# Altium PCB SoM BaseBoard Limbotics Prototype V0PcbDoc.PcbDoc (part 2 of 2)
Units mil, origin at the board's own origin, x right, y up, seen from the top; angles counter-clockwise.
Board outline 5680 x 2228.35 mil, 4 copper layers (Top Layer, GND, PWR, Bottom Layer), stack 61.811 mil thick; 127 components, 192 nets, 673 pads, 249 vias.
Unrouted connection lines stored in the file: 126.
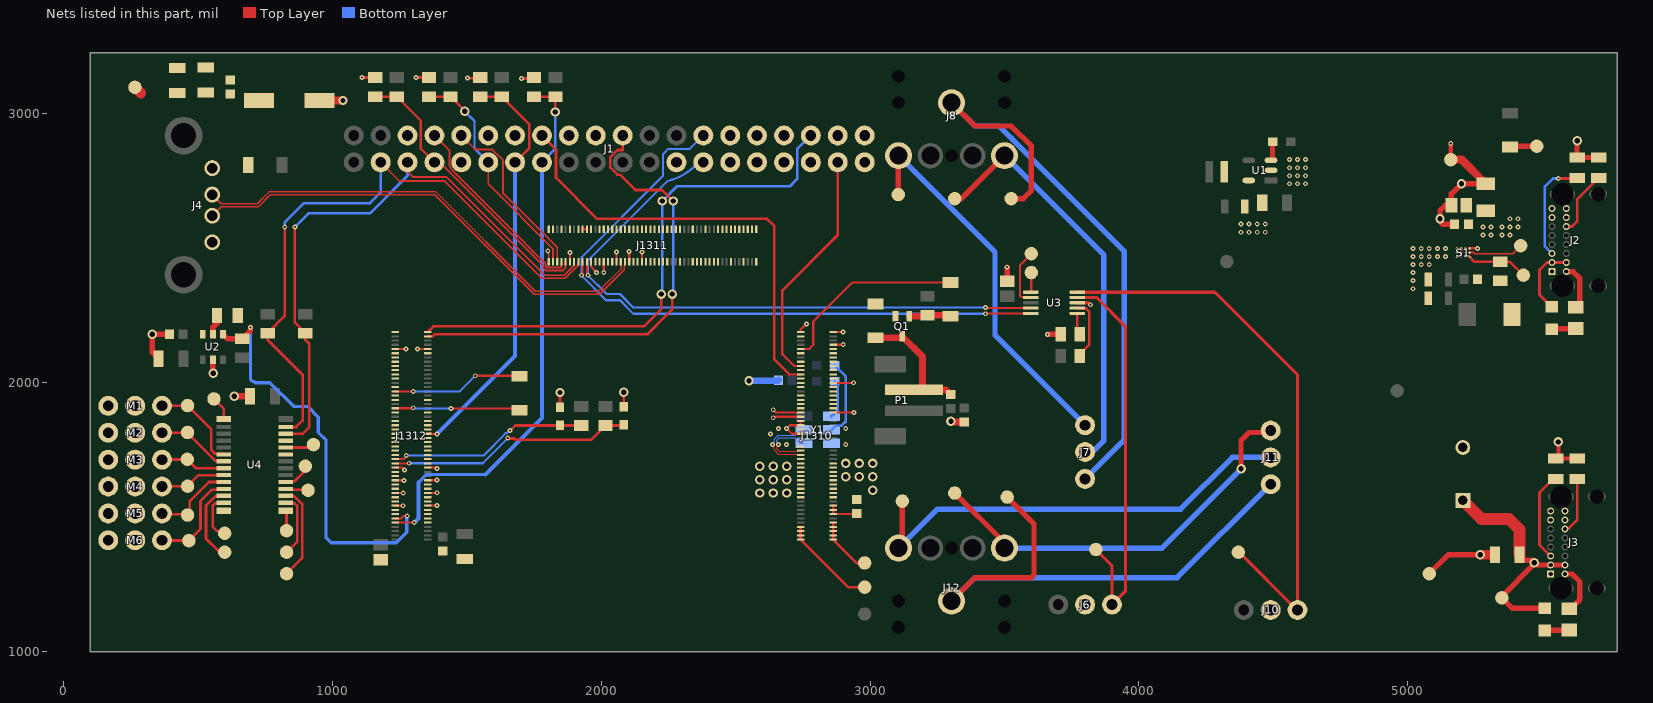
[diagram p4: the nets of this part, all layers, seen from the top]

## Via types
v1: diameter 18, hole 8, Top Layer to Bottom Layer, 168 vias
v2: diameter 35, hole 20, Top Layer to Bottom Layer, 81 vias

## Nets (pads, with @x,y where several pads share a name; then routed paths per layer and width w, separated by ;. In a path a pad name is that pad's centre, name@x,y a point inside that pad or via, vN(x,y) a via of type N, cw(c..) or ccw(c..) an arc to the next point about the centre after c; other vN are vias at no path point) (continued)
ECSPI2_MISO: J1.22 J1312.3 | length 1789.7
  Top Layer w10: J1312.3@1355.12,2172.83 1373.9,2172.83 1381.02,2179.96 2171.39,2179.96 2245.64,2254.21 2264,2272.57 v2(2264,2330) ; J1.22@2080,2920 2080,2866 2060.95,2866 2034,2839.05 2034,2800.95 2060.95,2774 2070,2774 2127,2717 2226.61,2717 v2(2267.61,2676)
  Bottom Layer w10: v2(2264,2330) 2267.61,2333.61 v2(2267.61,2676)
ECSPI2_SCLK: J1.18 J1312.2
ECSPI2_SS0: J1.36 J1312.1 | length 2025.7
  Top Layer w10: J1312.1@1355.12,2188.58 1376.5,2209.96 2158.96,2209.96 2224,2275 v2(2224,2330)
  Bottom Layer w10: v2(2224,2330) 2224,2332.43 2227.61,2336.03 v2(2227.61,2676) 2282.61,2731 2702,2731 2729,2758 2729,2869 J1.36@2780,2920
GND: C1.2 C2.2 C3.2 C4.1 C5.2 C6.2 C7.2 C8.2 C9.1 C10.1 C11.2 C12.1 C13.2 C14.1 C15.1 C16.1 C17.2 C18.2 C19.1 C21.2 C22.1 C23.1 C24.1 C25.1 D1.2 J1.6 J1.9 J1.14 J1.20 J1.25 J1.30 J1.34 J1.39 J2.A1 J2.A12 J2.B1 J2.B12 J3.A1 J3.A12 J3.B1 J3.B12 J4.4 J6.2 J10.2 J1310.1 J1310.2 J1310.7 J1310.25 J1310.39 J1310.40 J1310.42 J1310.44 J1310.46 J1310.50 J1310.56 J1310.62 J1310.63 J1310.64 J1310.65 J1310.66 J1310.67 J1310.68 J1310.69 J1310.70 J1310.71 J1310.72 J1310.73 J1310.74 J1310.75 J1310.76 J1310.77 J1310.78 J1310.80 J1311.1 J1311.2 J1311.7 J1311.8 J1311.13 J1311.14 J1311.19 J1311.20 J1311.25 J1311.26 J1311.31 J1311.32 J1311.37 J1311.38 J1311.43 J1311.44 J1311.49 J1311.50 J1311.55 J1311.56 J1311.61 J1311.62 J1311.67 J1311.68 J1311.73 J1311.74 J1311.79 J1311.80 J1311.86 J1311.89 J1311.90 J1311.94 J1311.99 J1311.100 J1312.9 J1312.10 J1312.65 J1312.66 J1312.71 J1312.72 J1312.77 J1312.78 J1312.83 J1312.84 M1.3 M2.3 M3.3 M4.3 M5.3 M6.3 Q1.2 R1.2 R2.1 R3.1 R4.1 R6.1 R7.1 R8.1 R10.1 R15.1 R18.1 R23.2 R24.2 R33.2 R34.2 R37.2 R38.2 S1.A4 S1.B4 S1.C1 S1.C4 TP9.1 TP11.1 U1.2 U2.2 U3.3 U4.14 U4.23 U4.25 Y1.3 | length 3725.7
  Top Layer w7: v1(1801.5,2490) 1801.5,2487.02 1805.12,2483.41 J1311.99@1805.12,2450
  Top Layer w8: J1312.84@1233.86,1542.91 1262.69,1542.91 v1(1262.85,1542.75) ; J1312.78@1233.86,1590.16 1263.84,1590.16 v1(1264,1590) ; J1312.72@1233.86,1637.4 1266.6,1637.4 v1(1267,1637) ; J1312.66@1233.86,1684.65 1259.64,1684.65 1268.28,1676 v1(1269,1676) ; J1312.10@1233.86,2125.59 v1(1273.59,2125.59) ; v1(1316.41,2125.59) J1312.9@1355.12,2125.59 ; J1312.83@1355.12,1542.91 1355.18,1542.98 1367.33,1542.98 v1(1389,1543) ; J1312.77@1355.12,1590.16 1388.16,1590.16 v1(1389,1591) ; J1312.71@1355.12,1637.4 1388.4,1637.4 v1(1389,1638) ; J1312.65@1355.12,1684.65 1383.65,1684.65 1387.29,1681 v1(1390,1681) ; J1311.89@1883.86,2450 v1(1883.86,2484.14) ; J1311.79@1962.6,2450 1962.6,2430.4 v1(1983,2410) ; v1(2009.84,2410.16) J1311.73@2009.84,2450 ; J1311.67@2057.09,2450 v1(2057.09,2486.91) ; v1(2104,2488) 2104.33,2487.67 J1311.61@2104.33,2450 ; J1311.55@2151.57,2450 v1(2151.57,2486.65) ; v1(2640,1870) 2642.71,1870 2646.33,1873.62 J1310.42@2741.73,1873.62 ; v1(2640,1900) 2650.63,1889.37 J1310.40@2741.73,1889.37 ; J1310.50@2741.73,1810.63 2709.37,1810.63 v1(2690,1830) 2702.13,1842.13 J1310.46@2741.73,1842.13 2741.8,1842.19 2741.8,1857.81 J1310.44@2741.73,1857.87 ; J1310.2@2741.73,2188.58 2741.73,2196.73 v1(2764,2219) ; J1310.39@2862.99,1889.37 2940.63,1889.37 v1(2941,1889) ; J1310.25@2862.99,1999.61 2937.61,1999.61 v1(2938,2000) ; J1310.7@2862.99,2141.34 2899.83,2141.34 v1(2900.57,2142.08) ; J1310.1@2862.99,2188.58 2899.58,2188.58 v1(2900,2189) ; R6.1@5550,1718.39 R6.1@5560,1728.39
  Top Layer w9: S1.C1@5230,2500 v1(5260,2500)
  Top Layer w10: v1(1111,3136) 1111.57,3135.43 R33.2@1160,3135.43 ; v1(1312,3136) 1312.57,3135.43 R34.2@1360,3135.43 ; v1(1503,3133) 1547.57,3133 R37.2@1550,3135.43 ; v1(1704,3132) 1746.57,3132 R38.2@1750,3135.43 ; R23.2@1847,1908.46 v2(1847,1964) ; R24.2@2084,1911.46 v2(2084,1965)
  Top Layer w12: U3.3@3771.3,2297.6 3771.39,2297.5 3810.87,2297.5 3818.38,2290 v1(3820,2290)
  Top Layer w15: R6.1@5550,1718.39 R7.1@5630,1718.39 ; R6.1@5560,1728.39 v2(5560,1780)
  Top Layer w18: TP9.1@5160,2830 v1(5160,2890) ; v2(5630,2900) R2.1@5630,2838.39 R4.1@5710,2838.39
  Top Layer w20: C14.1@353.74,2090 330,2113.74 v2(330,2180) C17.2@394.41,2180 ; U2.2@555.91,2086.16 555.91,2037.09 v2(557,2036) ; C19.1@3510,2377.56 v1(3510,2430) ; v1(3660,2180) R15.1@3709.57,2180 ; TP11.1@5080,1290 5150,1360 v2(5270,1360) ; C3.2@5174.41,2590 5130,2590 5120,2600 5120,2640 5140,2660 C4.1@5162.44,2660 5162.44,2702.44 v2(5200,2740) 5200.23,2740.23 C5.2@5290,2740.23 ; J3.B12@5584.69,1288.94 5611.06,1288.94 5640,1260 5640,1194.45 5604.92,1159.37 R8.1@5600,1159.37 ; J2.B12@5589.69,2413.94 5590.75,2412.87 5615.42,2412.87 5640,2388.28 5640,2294.06 5626.38,2280.43 R3.1@5625,2280.43
  Top Layer w25: v2(636,1950) C10.1@693.74,1950 ; v2(3301,1857) 3303.59,1854.41 C21.2@3350,1854.41
  Top Layer w30: C13.2@952.2,3050 v2(1040,3050) ; TP9.1@5160,2830 5200.23,2830 C5.2@5290,2740.23
  Top Layer w35: v2(5270,1360) C12.1@5323.74,1360
  Bottom Layer w25: v2(2550,2008) 2657.41,2008 C22.1@2659.41,2010
  other v1: 2690,1770 2910,1770 2630,1810 2660,1830 2910,1830 5020,2350 5020,2380 5020,2410 5020,2440 5050,2440 5080,2440 5020,2470 5050,2470 5080,2470 5110,2470 5140,2470 5020,2500 5050,2500 5080,2500 5110,2500 5140,2500 4380,2560 4410,2560 4440,2560 4470,2560 4380,2590 4410,2590 4440,2590 4470,2590 4560,2740 4590,2740 4620,2740 4560,2770 4590,2770 4620,2770 4560,2800 4590,2800 4620,2800 4560,2830 4590,2830 4620,2830
  other v2: 2590,1590 2640,1590 2690,1590 3010,1600 2590,1640 2640,1640 2690,1640 2910,1650 2960,1650 3010,1650 2590,1690 2640,1690 2690,1690 2910,1700 2960,1700 3010,1700 5120,2610
GPIO6: J1.13 J1312.49 R35.2 R37.1 | length 1553.6
  Top Layer w8: J1312.49@1355.12,1810.63 1355.18,1810.57 1368.43,1810.57 1369,1810 v1(1390,1810)
  Top Layer w9: R37.1@1550,3064.57 R35.2@1630,3064.57 1732,2962.57 1732,2872 J1.13@1680,2820
  Bottom Layer w15: v1(1390,1810) 1680,2100 J1.13@1680,2820
GPIO7: J1.29 J1312.45
GPIO8: J1.31 J1312.47
HDMI_REFCLK_N: J1310.60 Y1.5 | length 276.4
  Top Layer w4.51: v1(2637,1770) 2637,1767.36 2643.75,1760.61 2643.75,1750.52 2659.26,1735.01 2715.62,1735.01 2728.77,1735.01 2731.89,1731.89 J1310.60@2741.73,1731.89
  Bottom Layer w4.51: v1(2637,1770) 2637,1772.64 2643.75,1779.39 2643.75,1789.48 2659.02,1804.75 2721.94,1804.75 2724.58,1807.39 2724.58,1809.73 2739.84,1825 Y1.5@2753.82,1825
HDMI_REFCLK_P: J1310.58 Y1.4 | length 244.9
  Top Layer w4.51: v1(2660,1770) 2660,1767.36 2653.25,1760.61 2653.25,1754.46 2663.19,1744.52 2711.68,1744.52 2728.77,1744.52 2731.89,1747.64 J1310.58@2741.73,1747.64
  Bottom Layer w4.51: v1(2660,1770) 2660,1772.64 2653.25,1779.39 2653.25,1785.54 2662.96,1795.25 2721.94,1795.25 2724.58,1792.61 2724.58,1790.27 2739.84,1775 Y1.4@2753.82,1775
I2C2_SCL: J1.5 J1311.87 R27.2 U4.26 | length 2254.6
  Top Layer w7: J1.5@1280,2820 1280,2785.75 1300,2765.75 1424.25,2765.75 1790,2400 1862.18,2400 1899.17,2436.99 1899.17,2449.56 J1311.87@1899.61,2450
  Top Layer w10: U4.26@826.98,1810.16 889.66,1810.16 914.75,1835.25 914.75,2145.13 900,2159.88 R27.2@900,2184.57 861,2223.57 v1(861,2580)
  Bottom Layer w10: v1(861,2580) 911,2630 1140,2630 1280,2770 J1.5@1280,2820
I2C2_SDA: J1.3 J1311.85 R28.2 U4.27 | length 2350.8
  Top Layer w7: J1.3@1180,2820 1250,2750 1417.73,2750 1778.73,2389 1866.93,2389 1914.92,2436.99 1914.92,2449.56 J1311.85@1915.35,2450
  Top Layer w10: v1(823,2580) 823,2247.57 R28.2@760,2184.57 760,2159.88 890,2029.88 890,1860 865.75,1835.75 U4.27@826.98,1835.75
  Bottom Layer w10: v1(823,2580) 823,2595.74 895.26,2668 1140,2668 1180,2708 J1.3@1180,2820
I2C3_SCL: J1.28 J1311.83 U3.10 | length 2537.6
  Top Layer w8: v1(1927.48,2400) 1931.1,2403.63 J1311.83@1931.1,2450 ; v1(3430,2257) 3430.61,2257.61 3597.46,2257.61 U3.10@3598.07,2258.23
  Bottom Layer w8: J1.28@2380,2920 2330,2870 2250,2870 2230,2850 2230,2770 1927.48,2467.48 v1(1927.48,2400) 1927.48,2397.54 2018.02,2307 2070,2307 2120,2257 v1(3430,2257)
I2C3_SDA: J1.27 J1311.81 U3.9 | length 2377.1
  Top Layer w8: J1311.81@1946.85,2450 1946.85,2403.63 v1(1950.48,2400) ; v1(3430,2280) 3431.91,2278.09 3438.98,2278.09 3439.16,2277.91 U3.9@3598.07,2277.91
  Bottom Layer w8: J1.27@2380,2820 2363,2820 2352.05,2809.05 cw(c2198.13,2962.96) 2248.11,2751.11 1950.48,2453.48 v1(1950.48,2400) 2020.48,2330 2070,2330 2120,2280 v1(3430,2280)
MYO_END_1: J7.2 J8.3 TP14.1 | length 1551.7
  Top Layer w20: TP14.1@3315,2685 3340.28,2685 J8.3@3500,2844.72
  Bottom Layer w20: J8.3@3500,2844.72 3870,2474.72 3870,1785 3827.5,1742.5 J7.2@3800,1742.5
MYO_END_2: J11.2 J12.3 TP17.1 | length 1703.8
  Top Layer w20: J12.3@3106.3,1385.28 3120,1398.98 TP17.1@3120,1560
  Bottom Layer w20: J12.3@3106.3,1385.28 3251.02,1530 4155,1530 4347.5,1722.5 J11.2@4490,1722.5
MYO_MID_1: J7.3 J8.1 TP13.1 | length 2394.4
  Top Layer w20: J8.1@3303.15,3041.57 3389.72,2955 3525,2955 3600,2880 3600,2715 3570,2685 TP13.1@3525,2685
  Bottom Layer w20: J8.1@3303.15,3041.57 3389.72,2955 3480,2955 3526.08,2908.92 3526.59,2908.92 3564.2,2871.32 3564.2,2870.8 3945,2490 3945,1787.5 J7.3@3800,1642.5
MYO_MID_2: J11.3 J12.1 TP16.1 | length 2044.9
  Top Layer w20: J12.1@3303.15,1188.43 3303.43,1188.43 3390,1275 3600,1275 3610,1285 3610,1475 TP16.1@3510,1575
  Bottom Layer w20: J12.1@3303.15,1188.43 3389.72,1275 4142.5,1275 J11.3@4490,1622.5
MYO_REF_1: J7.1 J8.2 TP15.1 | length 1434.8
  Top Layer w20: TP15.1@3105,2700 3105,2843.43 J8.2@3106.3,2844.72
  Bottom Layer w20: J8.2@3106.3,2844.72 3465,2486.02 3465,2177.5 J7.1@3800,1842.5
MYO_REF_2: J11.1 J12.2 TP18.1 | length 1514
  Top Layer w20: TP18.1@3315,1590 3500,1405 J12.2@3500,1385.28 ; v2(4380,1680) 4380,1785 4410,1815 4482.5,1815 J11.1@4490,1822.5
  Bottom Layer w20: J12.2@3500,1385.28 4085.28,1385.28 v2(4380,1680)
NAND_DATA03: J1.16 J1310.22 | length 1682
  Top Layer w8: 2699.9,2031.1 J1310.22@2741.73,2031.1
  Top Layer w10: J1.16@1780,2920 1832,2868 1832,2763 1985,2610 2617,2610 2644,2583 2644,2087 2699.9,2031.1
NAND_DATA07: J1.37 J1310.18 | length 884.5
  Top Layer w8: 2674,2107 2718.4,2062.6 J1310.18@2741.73,2062.6
  Top Layer w10: 2674,2107 2674,2344 2880,2550 J1.37@2880,2820
NetC20_1: C20.1 P1.2 Q1.3 R18.2 | length 480.2
  Top Layer w25: R18.2@3020,2167.01 3114.41,2167.01 Q1.3@3120,2172.6 3195,2097.6 3195,1985 P1.2@3184.37,1974.37 ; P1.2@3163.58,1974.37 P1.2@3184.37,1974.37 ; C20.1@3300,1955.59 3281.22,1974.37 P1.2@3184.37,1974.37
NetJ2_A5: J2.A5 R2.2 | length 393.2
  Top Layer w10: v1(5560,2760) 5628.39,2760 R2.2@5630,2761.61
  Bottom Layer w10: J2.A5@5536.54,2480.87 5510,2507.4 5510,2730 5540,2760 v1(5560,2760)
NetJ2_B5: J2.B5 R4.2 | length 242.8
  Top Layer w10: J2.B5@5589.69,2581.26 5611.26,2581.26 5630,2600 5630,2681.61 R4.2@5710,2761.61
NetJ3_A5: J3.A5 R6.2 | length 333.6
  Top Layer w10: J3.A5@5531.54,1355.87 5490,1397.4 5490,1591.46 5540.16,1641.61 R6.2@5550,1641.61
NetJ3_B5: J3.B5 R7.2 | length 210.9
  Top Layer w10: J3.B5@5584.69,1456.26 5587.67,1459.24 5599.24,1459.24 5630,1490 R7.2@5630,1641.61
NetJ6_1: J6.1 TP34.1 U3.4 | length 1508.7
  Top Layer w12: U3.4@3771.3,2317.28 3842.72,2317.28 3950,2210 3950,1225 J6.1@3900,1175 3900,1320 TP34.1@3840,1380
NetJ10_1: J10.1 TP35.1 U3.5 | length 2129.9
  Top Layer w12: U3.5@3771.3,2336.97 4283.03,2336.97 4590,2030 J10.1@4590,1155 4587.5,1155 4372.5,1370 TP35.1@4370,1370
NetJ1310_4: J1310.4
NetJ1310_9: J1310.9
NetJ1310_10: J1310.10 R17.1 | length 711.7
  Top Layer w8: J1310.10@2741.73,2125.59 2773.59,2125.59 2789,2141 2789,2228 2933.99,2372.99 R17.1@3300,2372.99
NetJ1310_11: J1310.11
NetJ1310_12: J1310.12
NetJ1310_13: J1310.13
NetJ1310_15: J1310.15
NetJ1310_16: J1310.16
NetJ1310_17: J1310.17
NetJ1310_19: J1310.19
NetJ1310_20: J1310.20
NetJ1310_21: J1310.21
NetJ1310_23: J1310.23
NetJ1310_24: J1310.24
NetJ1310_26: J1310.26
NetJ1310_27: J1310.27
NetJ1310_28: J1310.28
NetJ1310_29: J1310.29
NetJ1310_31: J1310.31
NetJ1310_32: J1310.32
NetJ1310_33: J1310.33
NetJ1310_34: J1310.34
NetJ1310_35: J1310.35
NetJ1310_36: J1310.36
NetJ1310_37: J1310.37
NetJ1310_38: J1310.38
NetJ1310_48: J1310.48
NetJ1310_79: J1310.79
NetJ1311_4: J1311.4
NetJ1311_6: J1311.6
NetJ1311_10: J1311.10
NetJ1311_12: J1311.12
NetJ1311_16: J1311.16
NetJ1311_18: J1311.18
NetJ1311_21: J1311.21
NetJ1311_23: J1311.23
NetJ1311_27: J1311.27
NetJ1311_29: J1311.29
NetJ1311_40: J1311.40
NetJ1311_42: J1311.42
NetJ1311_45: J1311.45
NetJ1311_46: J1311.46
NetJ1311_47: J1311.47
NetJ1311_48: J1311.48
NetJ1311_51: J1311.51
NetJ1311_52: J1311.52
NetJ1311_53: J1311.53
NetJ1311_54: J1311.54
NetJ1311_57: J1311.57
NetJ1311_58: J1311.58
NetJ1311_59: J1311.59
NetJ1311_60: J1311.60
NetJ1311_64: J1311.64
NetJ1311_66: J1311.66
NetJ1311_69: J1311.69
NetJ1311_70: J1311.70
NetJ1311_71: J1311.71
NetJ1311_72: J1311.72
NetJ1311_75: J1311.75 J1311.77
NetJ1311_76: J1311.76
NetJ1311_82: J1311.82 J1311.84 | length 15.7
  Top Layer w8: J1311.84@1931.1,2571.26 J1311.82@1946.85,2571.26
NetJ1311_98: J1311.98
NetJ1312_11: J1312.11
NetJ1312_12: J1312.12
NetJ1312_14: J1312.14
NetJ1312_16: J1312.16
NetJ1312_18: J1312.18
NetJ1312_20: J1312.20
NetJ1312_22: J1312.22
NetJ1312_24: J1312.24
NetJ1312_28: J1312.28
NetJ1312_30: J1312.30 R25.1 | length 487
  Top Layer w8: J1312.30@1233.86,1968.11 1300.89,1968.11 v1(1301,1968) ; v1(1532,2026) 1693.99,2026 R25.1@1696,2023.99
  Bottom Layer w8: v1(1301,1968) 1474,1968 v1(1532,2026)
NetJ1312_32: J1312.32
NetJ1312_34: J1312.34
NetJ1312_38: J1312.38 R25.2 | length 466.6
  Top Layer w8: J1312.38@1233.86,1905.12 1299.12,1905.12 v1(1301,1907) ; v1(1441,1905) 1689.01,1905 R25.2@1696,1898.01
  Bottom Layer w8: v1(1301,1907) 1303,1905 v1(1441,1905)
NetJ1312_39: J1312.39
NetJ1312_43: J1312.43
NetJ1312_48: J1312.48
NetJ1312_50: J1312.50
NetJ1312_51: J1312.51
NetJ1312_52: J1312.52
NetJ1312_53: J1312.53
NetJ1312_54: J1312.54
NetJ1312_55: J1312.55
NetJ1312_56: J1312.56
NetJ1312_57: J1312.57
NetJ1312_58: J1312.58
NetJ1312_59: J1312.59
NetJ1312_60: J1312.60
NetJ1312_61: J1312.61
NetJ1312_62: J1312.62 R22.2 R23.1 | length 746.1
  Top Layer w8: J1312.62@1233.86,1716.14 1266.04,1716.14 1275,1725.1 v1(1275,1729) ; v1(1661,1822) 1680,1841
  Top Layer w10: 1680,1841 1847.54,1841 R22.2@1926,1841
  Bottom Layer w8: v1(1275,1729) 1562.14,1729 1645.34,1812.2 1648.5,1812.2 1658.29,1822 v1(1661,1822)
NetJ1312_63: J1312.63
NetJ1312_64: J1312.64 R21.2 R24.1 | length 915
  Top Layer w8: J1312.64@1233.86,1700.39 1285.39,1700.39 v1(1286,1701)
  Top Layer w10: v1(1652.8,1794.2) 1654,1793 1676.8,1793 1681.8,1788 1963,1788 R21.2@2016,1841 2080.46,1841 R24.1@2084,1844.54
  Bottom Layer w8: v1(1286,1701) 1559.59,1701 v1(1652.8,1794.2)
NetJ1312_68: J1312.68
NetJ1312_70: J1312.70
NetJ1312_73: J1312.73
NetJ1312_74: J1312.74
NetJ1312_75: J1312.75
NetJ1312_76: J1312.76
NetJ1312_79: J1312.79
NetJ1312_80: J1312.80
NetJ1312_81: J1312.81
NetJ1312_82: J1312.82
NetJ1312_85: J1312.85
NetJ1312_86: J1312.86
NetJ1312_87: J1312.87
NetJ1312_89: J1312.89
NetJ1312_91: J1312.91
NetLED1_1: LED1.1 R3.2 | length 90.8
  Top Layer w20: LED1.1@5535,2199.72 5535.98,2200.71 5624.02,2200.71 R3.2@5625,2201.69
NetLED2_1: LED2.1 R8.2 | length 90.8
  Top Layer w20: LED2.1@5510,1078.66 5510.98,1079.65 5599.02,1079.65 R8.2@5600,1080.63
NetQ1_1: Q1.1 R16.2 R17.2 | length 158
  Top Layer w25: Q1.1@3145.59,2247.4 3209.81,2247.4 R16.2@3214.01,2251.6 3295.41,2251.6 R17.2@3300,2247.01
NetR1_1: R1.1 S1.A1 TP4.1 | length 228.4
  Top Layer w9: S1.A1@5230,2468.5 5248.82,2449.68 R1.1@5344.25,2449.68 5380.31,2449.68 TP4.1@5430,2400
NetR10_2: R10.2 U2.5 | length 75.9
  Top Layer w20: U2.5@555.91,2180.65 555.91,2205.91 571.61,2221.61 R10.2@571.61,2250
NetR12_1: R12.1 U3.2 | length 228.2
  Top Layer w10: U3.2@3771.3,2277.91 3772.2,2277.01 3802.99,2277.01 3814.81,2265.19 3814.81,2141.27 3780.43,2106.89 R12.1@3780.43,2100
NetR15_2: R15.2 U3.1 | length 82
  Top Layer w8: R15.2@3771.3,2189.13 R15.2@3780.43,2180
  Top Layer w10: R15.2@3771.3,2189.13 U3.1@3771.3,2258.23
NetR19_1: R19.1 Y1.2 | length 292.4
  Bottom Layer w10: Y1.2@2856.18,1825 2871.18,1840 2893.13,1840 2896.57,1843.43 2910,1856.87 2910,2023.46 R19.1@2868.46,2065
NetR20_1: R20.1 Y1.1 | length 162
  Bottom Layer w10: Y1.1@2856.18,1875 2880,1898.82 2880,1993.46 R20.1@2868.46,2005
  Bottom Layer w12: Y1.1@2856.18,1875 Y1.1@2868.46,1887.28
NetR26_1: R26.1 U1.3 | length 57.2
  Top Layer w18: U1.3@4491.36,2827.4 4497.54,2833.58 R26.1@4497.54,2882
NetS1_B1: S1.B1 TP8.1 | length 204.2
  Top Layer w7: S1.B1@5230,2484.25 5245.75,2484.25 5250,2480 5390,2480 TP8.1@5420,2510
NetTP23_1: TP23.1 U3.6 | length 74.4
  Top Layer w10: U3.6@3598.07,2336.97 3599.09,2336.97 3600,2337.87 TP23.1@3600,2410
NetTP24_1: TP24.1 U3.7 | length 216.8
  Top Layer w8: U3.7@3598.07,2317.28 3596.17,2319.19 3562.34,2319.19 3557.66,2323.88 3557.66,2437.66 TP24.1@3600,2480
NetTP27_1: TP27.1 U4.1 | length 89.9
  Top Layer w10: TP27.1@560,1940 596.66,1903.34 U4.1@596.66,1865.28
NetTP28_1: TP28.1 U4.12 | length 295.8
  Top Layer w10: U4.12@596.66,1579.84 593.94,1577.13 563.87,1577.13 530,1543.25 530,1420 572.35,1377.65 592.35,1377.65 TP28.1@600,1370
NetTP29_1: TP29.1 U4.13 | length 178.9
  Top Layer w10: U4.13@596.66,1554.25 593.94,1551.54 563.87,1551.54 555.09,1542.75 555.09,1465.86 573.29,1447.65 592.35,1447.65 TP29.1@600,1440
NetTP30_1: TP30.1 U4.24 | length 107.6
  Top Layer w10: U4.24@826.98,1758.98 908.15,1758.98 919.18,1770 TP30.1@930,1770
NetTP31_1: TP31.1 U4.15 | length 76
  Top Layer w10: U4.15@826.98,1524.72 830,1521.7 TP31.1@830,1450
NetTP32_1: TP32.1 U4.16 | length 236.3
  Top Layer w10: U4.16@826.98,1554.25 829.69,1551.54 859.76,1551.54 870,1541.3 870,1410 TP32.1@830,1370
NetTP33_1: TP33.1 U4.17 | length 356.7
  Top Layer w10: U4.17@826.98,1579.84 829.69,1577.13 859.76,1577.13 887.87,1549.02 887.87,1347.87 TP33.1@830,1290
NetTP36_1: TP36.1 U4.18 | length 85.3
  Top Layer w10: U4.18@826.98,1605.43 829.69,1602.72 907.28,1602.72 TP36.1@910,1600
NetTP37_1: TP37.1 U4.19 | length 106.8
  Top Layer w10: U4.19@826.98,1631.02 829.69,1633.74 859.76,1633.74 892.35,1666.32 892.35,1682.35 TP37.1@900,1690
nUSBFault: J1.33 J1312.90 R9.1 U2.4 | length 1531.9
  Top Layer w8: J1312.90@1233.86,1495.67 1256.67,1495.67 1265,1504 v1(1279,1504)
  Top Layer w20: U2.4@593.32,2180.65 610.69,2163.27 R9.1@665,2163.27 696,2194.27 v1(696,2206)
  Bottom Layer w12: v1(696,2206) 696,2012.03 703.03,2005 708,2005 713,2000 768,2000 856,1912 908,1912 948,1872 948,1815 977,1786 977,1424 996,1405 1238,1405 1277,1444 1277,1502 v1(1279,1504)
NVCC_ENET_2V5: C1.1 J1310.83 J1310.85 J1310.87 | length 119.7
  Top Layer w8: J1310.83@2862.99,1542.91 J1310.85@2862.99,1527.17 J1310.87@2862.99,1511.42 2947.01,1511.42 C1.1@2950,1514.41
PWM1: J1.32 J1312.88
PWM3: J1.15 J1312.92 R36.2 R38.1 | length 2082.1
  Top Layer w8: J1312.92@1233.86,1479.92 1233.92,1479.98 1248.98,1479.98 v1(1305,1480)
  Top Layer w9: R38.1@1750,3064.57 R36.2@1830,3064.57 1830,3008 v2(1829,3007)
  Bottom Layer w9: J1.15@1780,2820 1829,2869 v2(1829,3007)
  Bottom Layer w10: 1350,1659 1570,1659
  Bottom Layer w12: 1320,1629 1350,1659
  Bottom Layer w15: v1(1305,1480) 1320,1495 1320,1629 ; 1570,1659 1780,1869 J1.15@1780,2820
SAI1_RXD0: J1.38 J1312.33
SAI1_TXC: J1.12 J1312.40
SAI1_TXD0: J1.40 J1312.44
SAI1_TXFS: J1.35 J1312.46
SERVO_1: M1.1 TP19.1 U4.6 | length 350.8
  Top Layer w10: M1.1@366.83,1914.17 367.36,1914.7 461.3,1914.7 TP19.1@461.83,1915.24 550,1827.06 550,1749.98 563.87,1736.1 593.94,1736.1 U4.6@596.66,1733.39
SERVO_2: M2.1 TP20.1 U4.7 | length 276.3
  Top Layer w10: M2.1@366.83,1814.17 367.36,1814.7 461.3,1814.7 TP20.1@461.83,1815.24 461.83,1812.56 563.79,1710.59 593.87,1710.59 U4.7@596.66,1707.8
SERVO_3: M3.1 TP21.1 U4.8 | length 244
  Top Layer w10: M3.1@366.83,1714.17 367.36,1714.7 460.3,1714.7 TP21.1@460.83,1715.24 493.86,1682.2 U4.8@596.66,1682.2
SERVO_4: M4.1 TP22.1 U4.9 | length 247.4
  Top Layer w10: M4.1@366.83,1614.17 367.36,1614.7 461.3,1614.7 TP22.1@461.83,1615.24 503.2,1656.61 U4.9@596.66,1656.61
SERVO_5: M5.1 TP25.1 U4.10 | length 308.9
  Top Layer w10: M5.1@366.83,1514.17 369.86,1511.14 458.8,1511.14 TP25.1@461.83,1508.11 469.48,1515.76 469.48,1533.45 470,1533.97 470,1560 541.02,1631.02 U4.10@596.66,1631.02
SERVO_6: M6.1 TP26.1 U4.11 | length 370.7
  Top Layer w10: M6.1@366.83,1414.17 367.36,1413.64 466.3,1413.64 TP26.1@466.83,1413.11 510,1456.28 510,1560 552.72,1602.72 593.94,1602.72 U4.11@596.66,1605.43
SW: L1.1 U1.5
UART1_RXD: J1.10 J1311.95 | length 654.6
  Top Layer w7: J1.10@1480,2920 1532.69,2867.31 1595.63,2867.31 1635.5,2827.43 1635.5,2704.5 1836.61,2503.39 J1311.95@1836.61,2450
UART1_TXD: J1.8 J1311.93 | length 735.6
  Top Layer w7: J1.8@1380,2920 1435.5,2864.5 1435.5,2837.39 1435.5,2834.5 cw(c1429.62,2830.7) 1436.47,2829.26 ccw(c1480,2820) 1448.53,2788.53 1717.56,2519.51 1718.4,2517.15 1728.65,2506.9 1734.62,2501.32 1744.49,2491.46 1793.68,2441.88 1793.68,2433.11 1798.07,2428.72 1814.17,2428.72 1827.91,2428.72 1827.96,2428.77 1828.74,2428.77 1829.52,2428.77 1829.57,2428.72 1847.82,2428.72 1851.93,2432.82 1851.93,2449.56 J1311.93@1852.36,2450
UART3_RXD: J1.11 J1311.97 R32.2 R34.1 | length 852.3
  Top Layer w7: J1.11@1580,2820 1580,2740 1820.87,2499.13 J1311.97@1820.87,2450
  Top Layer w9: R34.1@1360,3064.57 R32.2@1440,3064.57 1492,3012.57 v2(1492,3010)
  Bottom Layer w9: v2(1492,3010) 1529,2973 1529,2871 J1.11@1580,2820
UART3_TXD: J1.7 J1311.91 R31.2 R33.1 | length 1068.6
  Top Layer w7: J1.7@1380,2820 1400,2820 1782.68,2437.32 1782.68,2428.56 1793.52,2417.72 1857.72,2417.72 1868.11,2428.11 J1311.91@1868.11,2450
  Top Layer w9: R33.1@1160,3064.57 R31.2@1240,3064.57 1329,2975.57 1329,2871 J1.7@1380,2820
USB2_D_N: J4.2 J1311.65 | length 1768.5
  Top Layer w5.85: J4.2@553.54,2700 587.49,2666.05 720.73,2666.05 764.68,2710 1385.34,2710 1755.34,2340 1990.34,2340 2075.28,2424.94 2075.28,2437.71 2072.83,2440.16 J1311.65@2072.83,2450
USB2_D_P: J4.3 J1311.63 | length 1786.5
  Top Layer w5.85: J4.3@553.54,2621.26 587.49,2655.21 725.22,2655.21 769.17,2699.15 1380.85,2699.15 1750.85,2329.15 1994.84,2329.15 2086.13,2420.45 2086.13,2437.71 2088.58,2440.16 J1311.63@2088.58,2450
USB_5V_Servos: C11.1 C12.2 J3.A4 J3.A9 J3.B4 J3.B9 LED2.2 M1.2 M2.2 M3.2 M4.2 M5.2 M6.2 TP10.1 | length 896.7
  Top Layer w20: C12.2@5416.26,1360 5416.26,1348.19 5424.96,1339.49 5460.51,1339.49 v2(5470,1330) ; LED2.2@5510,1161.34 5389.12,1161.34 5350.46,1200 TP10.1@5350,1200 5350,1205.94 5470,1325.94 v2(5470,1330) ; J3.B9@5584.69,1322.4 5481.66,1322.4 5474.06,1330 v2(5470,1330)
  Top Layer w45: C11.1@5205,1562.64 5273.7,1493.94 5375.96,1493.94 5416.26,1453.64 C12.2@5416.26,1360
USB_5V_SoM: C3.1 C4.2 C5.1 J2.A4 J2.A9 J2.B4 J2.B9 LED1.2 R5.1 S1.B3 S1.C2 S1.C3 TP5.1 | length 384.3
  Top Layer w9: S1.B3@5198.5,2484.25 S1.C3@5198.5,2500
  Top Layer w10: LED1.2@5535,2282.4 5490,2327.4 5490,2420 5517.4,2447.4 J2.A4@5536.54,2447.4 J2.B9@5589.69,2447.4
  Top Layer w20: R5.1@5380,2877.01 5382.99,2880 TP5.1@5480,2880
  other v1: 5280,2550 5310,2550 5350,2550 5380,2550 5280,2580 5310,2580 5350,2580 5380,2580 5410,2580 5380,2610 5410,2610
VDD_3V3: J1310.94 J1310.96 J1310.98 J1310.100 TP2.1 | length 358.8
  Top Layer w10: J1310.94@2741.73,1464.17 J1310.96@2741.73,1448.43 J1310.98@2741.73,1432.68 J1310.100@2741.73,1416.93 2918.66,1240 TP2.1@2980,1240
VDDA_1V8: J1310.91 J1310.93 J1310.95 J1310.97 J1310.99 TP3.1 | length 220
  Top Layer w10: J1310.91@2862.99,1479.92 J1310.93@2862.99,1464.17 J1310.95@2862.99,1448.43 J1310.97@2862.99,1432.68 J1310.99@2862.99,1416.93 2949.92,1330 TP3.1@2984,1330
VUSB: C13.1 C15.2 C16.2 C18.1 J4.1 R11.2 TP12.1 U2.6 | length 30.2
  Top Layer w40: TP12.1@266,3099 287.36,3077.64
pads on no net: J2.1 J2.2 J2.3 J2.4 J2.A6 J2.A7 J2.A8 J2.B6 J2.B7 J2.B8 J3.1 J3.2 J3.3 J3.4 J3.A6 J3.A7 J3.A8 J3.B6 J3.B7 J3.B8 J4.MH1 J4.MH2 J8.10 J8.11 J8.MH1 J8.MH2 J8.MH3 J8.MH4 J8.MH5 J12.10 J12.11 J12.MH1 J12.MH2 J12.MH3 J12.MH4 J12.MH5 J1310.3 J1310.5 J1310.8 J1310.14 J1310.30 J1310.41 J1310.43 J1310.45 J1310.47 J1310.49 J1310.51 J1310.52 J1310.53 J1310.54 J1310.55 J1310.57 J1310.59 J1310.61 J1310.81 J1310.82 J1310.89 J1310.92 J1311.3 J1311.5 J1311.9 J1311.11 J1311.15 J1311.17 J1311.22 J1311.24 J1311.28 J1311.30 J1311.33 J1311.34 J1311.35 J1311.36 J1311.39 J1311.41 J1311.78 J1311.88 J1311.92 J1311.96 J1312.6 J1312.13 J1312.15 J1312.17 J1312.19 J1312.21 J1312.23 J1312.25 J1312.26 J1312.27 J1312.29 J1312.31 J1312.35 J1312.36 J1312.37 J1312.41 J1312.42 J1312.67 J1312.69 P1.MP1 P1.MP2 U4.2 U4.3 U4.4 U4.5 U4.20 U4.21 U4.22

## Polygon pours and split planes (outlines as drawn)
GND on Top Layer "GND_L01_P021" (solid, pour order 21): 2755,1569.81 2755,1720 2557,1720 2550,1713 2550,1569.81
GND on Top Layer "GND_L01_P020" (solid, pour order 20): 2849,1704 2849,1586 2878,1586 2915,1549 3009,1549 3040,1580 3040,1720 3030,1730 2906.12,1730 2880.12,1704
5VSYS on Top Layer "SoM 5V" (solid, pour order 19): 1220,1468 1220,1430 1209,1419 1154,1419 1154,1376 1360,1376 1395,1411 1591,1411 1695,1515 1695,1620 1682,1633 1433,1633 1410,1610 1410,1489 1389,1468
VUSB on Top Layer "VUSB_L01_P018" (solid, pour order 18): 784,3078 672,3078 659,3091 586,3091 578,3099 266,3099 256,3089 256,2327 313,2270 419,2270 506,2183 506,2166 508,2164 529,2164 529,2281 430,2380 430,2724 460,2754 687,2754 725,2792 725,2873 726,2873 785,2932
5VSYS on Top Layer "5VSYS_L01_P016" (solid, pour order 16): 582,2102 582,2071 586,2067 694,2067 731,2030 760,2030 766,2036 766,2122 757,2131 706,2131 688,2113 636,2113 626,2103 590,2103
5VSYS on Top Layer "5VSYSFromInput" (solid, pour order 14): 5214.36,2488.48 5218.52,2484.32 5218.52,2451.09 5225.97,2443.64 5225.97,2366.98 5224.18,2365.19 5254.18,2335.18 5254.18,2175.82 5330,2100 5330,1950 5320,1940 4940,1940 4930,1950 4930,2074.62 5137.69,2282.31 5137.69,2409.84 5187.86,2453.67 5195.75,2471.18 5206.85,2477.79 5210.25,2485.68
GND on Top Layer "5VIN GND" (solid, pour order 10): 5186.98,2470.27 5186.98,2500.69 5182.7,2504.49 5160,2527.2 5017.2,2527.2 5000,2510 5000,2330 5060,2270 5090,2270 5100,2280 5100,2410 5121.17,2410
USB_5V_SoM on Top Layer "Top Layer-USB_5V_SoM" (solid, pour order 12): 5202.98,2487.88 5206.84,2493.07 5216.57,2496.16 5218.46,2498.52 5218.46,2510.13 5225.91,2517.57 5230.29,2519.36 5387.67,2519.36 5468.55,2600.24 5599.45,2600.24 5609.52,2610.31 5609.52,2626.13 5516.74,2626.13 5410,2732.87 5410,2900 5340,2900 5340,2695.91 5330.21,2686.13 5203.69,2686.13 5203.69,2551.44 5194.71,2542.46 5194.71,2497.21 5194.03,2496.54 5194.41,2496.16 5194.41,2487.88
5VSYS on Top Layer "5VIN BYPASS" (solid, pour order 13): 5120,2980 5120,3120 5160,3160 5560,3160 5620,3100 5620,3010 5590,2980
3V3 on Top Layer "3V3 Out" (solid, pour order 6): 4274.47,2824.02 4274.68,2823.81 4274.68,2734.32 4328,2681 4332,2681 4332,2628 4332,2553 4317,2538 4200,2538 4178,2560 4178,2765 4237,2824 4247,2824
GND on Top Layer "3V3 Buck Reg GND" (solid, pour order 3): 4525,2853 4526,2854 4640,2854 4640,2730 4632,2722 4545,2722 4534,2733 4534,2763 4517,2780 4470,2780 4460,2770 4460,2716 4486,2690 4486,2552 4473,2539 4373,2539 4361,2551 4361,2677 4407,2723 4428,2723 4438,2733 4438,2789 4449,2800 4509,2800 4521,2812
5VSYS on Top Layer "3V3 Buck Reg Vin-5VSYS" (solid, pour order 5): 4467.65,2762.86 4467.65,2732.35 4503,2697 4503,2557 4510,2550 4678,2550 4686,2558 4686,2682 4668,2700 4542,2700 4515,2727 4515,2763
SW on Top Layer "3V3 Switch" (solid, pour order 2): 4422.44,2742.01 4421.79,2742.66 4304.45,2742.66 4304.45,2824.35 4305.41,2825.32 4331.29,2825.32 4393.43,2763.18 4418.82,2763.18 4425,2757
GND on GND (split plane): 5759.9,1020.1 120.1,1020.1 120.1,3208.25 5759.9,3208.25
USB_5V_SoM on PWR (split plane): 5751.9,2917.89 5751.9,2289.11 5717.89,2255.1 5502.11,2255.1 5332.6,2424.6 5330.95,2425.71 5329,2426.1 5071.11,2426.1 5013.1,2484.11 5013.1,2835.89 5117.11,2939.9 5729.89,2939.9
3V3 on PWR (split plane): 4324.9,2626.89 4324.9,1983.11 4232.89,1891.1 3504.11,1891.1 3285.6,2109.6 3283.95,2110.71 3282,2111.1 2930,2111.1 2928.05,2110.71 2926.4,2109.6 2751.89,1935.1 1839.11,1935.1 1751.1,2023.11 1751.1,2277 1750.71,2278.95 1749.6,2280.6 1412.6,2617.6 1410.95,2618.71 1409,2619.1 992,2619.1 990.05,2618.71 988.4,2617.6 958.4,2587.6 957.29,2585.95 956.9,2584 956.9,2326.11 904.89,2274.1 756.11,2274.1 727.1,2303.11 727.1,2568.89 1024.11,2865.9 4085.89,2865.9
GND on PWR (split plane): 2934.9,1755.1 2615.1,1755.1 2615.1,1810 2615.1,1844.9 2934.9,1844.9
5VSYS on PWR (split plane): 5759.9,2924.31 5735.6,2948.6 5733.95,2949.71 5732,2950.1 5115,2950.1 5113.05,2949.71 5111.4,2948.6 5004.4,2841.6 5003.29,2839.95 5002.9,2838 5002.9,2482 5003.29,2480.05 5004.4,2478.4 5065.4,2417.4 5067.05,2416.29 5069,2415.9 5326.89,2415.9 5496.4,2246.4 5498.05,2245.29 5500,2244.9 5720,2244.9 5721.95,2245.29 5723.6,2246.4 5759.9,2282.69 5759.9,1925.1 4950,1925.1 4948.05,1924.71 4946.4,1923.6 4507.89,1485.1 3000,1485.1 2998.05,1484.71 2996.4,1483.6 2972.89,1460.1 1435,1460.1 1433.05,1459.71 1431.4,1458.6 1406.4,1433.61 1406.4,1433.6 1367.89,1395.1 1202.11,1395.1 1173.6,1423.6 1171.95,1424.71 1170,1425.1 992.11,1425.1 975.1,1442.11 975.1,1680 974.71,1681.95 973.6,1683.6 923.6,1733.6 921.95,1734.71 920,1735.1 532.11,1735.1 495.1,1772.11 495.1,1940 494.71,1941.95 493.6,1943.6 443.6,1993.6 441.95,1994.71 440,1995.1 120.1,1995.1 120.1,3208.25 5759.9,3208.25
USB_5V_Servos on PWR (split plane): 484.9,1937.89 484.9,1770 485.29,1768.05 486.4,1766.4 526.4,1726.4 528.05,1725.29 530,1724.9 917.89,1724.9 964.9,1677.89 964.9,1440 965.29,1438.05 966.4,1436.4 986.4,1416.4 988.05,1415.29 990,1414.9 1167.89,1414.9 1196.4,1386.4 1198.05,1385.29 1200,1384.9 1370,1384.9 1371.95,1385.29 1373.6,1386.4 1413.6,1426.4 1413.61,1426.4 1437.11,1449.9 2975,1449.9 2976.95,1450.29 2978.6,1451.4 3002.11,1474.9 4510,1474.9 4511.95,1475.29 4513.6,1476.4 4952.11,1914.9 5759.9,1914.9 5759.9,1020.1 120.1,1020.1 120.1,1982.89 122.11,1984.9 437.89,1984.9

## Keep-outs
Bottom Layer:
  region: 4244,2834 4244,2742 4243,2741 4246,2738 4422.67,2738 4432.34,2747.67 4432.34,2757.66 4426.82,2763.18 4392.82,2763.18 4322,2834
  region: 4304.45,2742.66 4304.45,2824.35 4305.41,2825.32 4331.29,2825.32 4393.43,2763.18 4426.82,2763.18 4432.34,2757.66 4432.34,2747.67 4427.46,2742.79
Keep-Out Layer:
  rectangle: 1207.48,2260.8 1372.93,2613.06
  rectangle: 1000.12,1433.95 1207.48,2613.06

## Other copper
GND (plane layer: these items are gaps in the copper):
  rectangle: 1200,2262 1372,2614
  rectangle: 999,1434 1216,2615
  region: 4242,2738 4242,2834 4328,2834 4399,2763 4422,2763 4430,2755 4430,2743 4425,2738
  lines w10: 4242,2738 4425,2738 4430,2743 4430,2755 4422,2763 4399,2763 4328,2834 4242,2834 4242,2738
PWR (plane layer: these items are gaps in the copper):
  rectangle: 1217,2262 1374,2612
  rectangle: 1001,1435 1218,2613
  region: 4242,2835 4243,2834 4243,2738 4425,2738 4430,2743 4430,2755 4422,2763 4400,2763 4328,2835
  lines w10: 5760,1920 4950,1920 4510,1480 3000,1480 2975,1455 1435,1455 1410,1430 1370,1390 1220,1390 1200,1390 1170,1420 990,1420 970,1440 970,1680 920,1730 530,1730 490,1770 490,1940 440,1990 120,1990 100,1970 100,1010 5770,1010 5770,1910 ; 722,2301 754,2269 907,2269 962,2324 962,2584 992,2614 1409,2614 1746,2277 1746,2021 1837,1930 2754,1930 2930,2106 3282,2106 3502,1886 4235,1886 4330,1981 4330,2629 4088,2871 1022,2871 722,2571 722,2301 ; 2610,1750 2940,1750 2940,1850 2610,1850 2610,1810 2610,1750 ; 4242,2739 4242,2835 4328,2835 4400,2763 4422,2763 4430,2755 4430,2743 4425,2738 4243,2738 4242,2739 ; 5008,2482 5008,2838 5115,2945 5732,2945 5757,2920 5757,2287 5720,2250 5500,2250 5329,2421 5069,2421 5008,2482

## Silkscreen, mask and mechanical layers (free items; w line width, h text height)
Top Overlay:
  lines w3.94: 1000,1433.07 1216.54,1433.07 1216.54,2259.84 1374.02,2259.84 1374.02,2614.17 ; 4008.55,3169.04 4000,1110 4250,1110 ; 4698.55,3149.04 4690,1090 4940,1090 ; 1000,1000 2929.13,1000 2929.13,2614.17 1000,2614.17 1000,1000
  lines w5: 1177.17,1000 1177.17,1108.27 ; 2043.31,1000 2043.31,1108.27
  lines w8: 1108.27,1108.27 2820.87,1108.27 2820.87,2505.91 1108.27,2505.91 1108.27,1108.27
  text "I2C Pullups" at 576,2014.33 h25
  text "Keep  Out" at 1011,1447.66 h20
  text "2.8mm Max Height" at 1191,1012.66 h20
  text "1.5mm Max Height" at 2056,1012.66 h20
Board Outline:
  lines w10: 100,1000 100,3229 5780,3229 5780,1000 100,1000

## Text inside footprints (layer, text, board x,y; h text height)
C11: Top Overlay "+" at 5234.53,1353.99 h59.06 r90